# EAGLE board v2m (EAGLE 6.2)
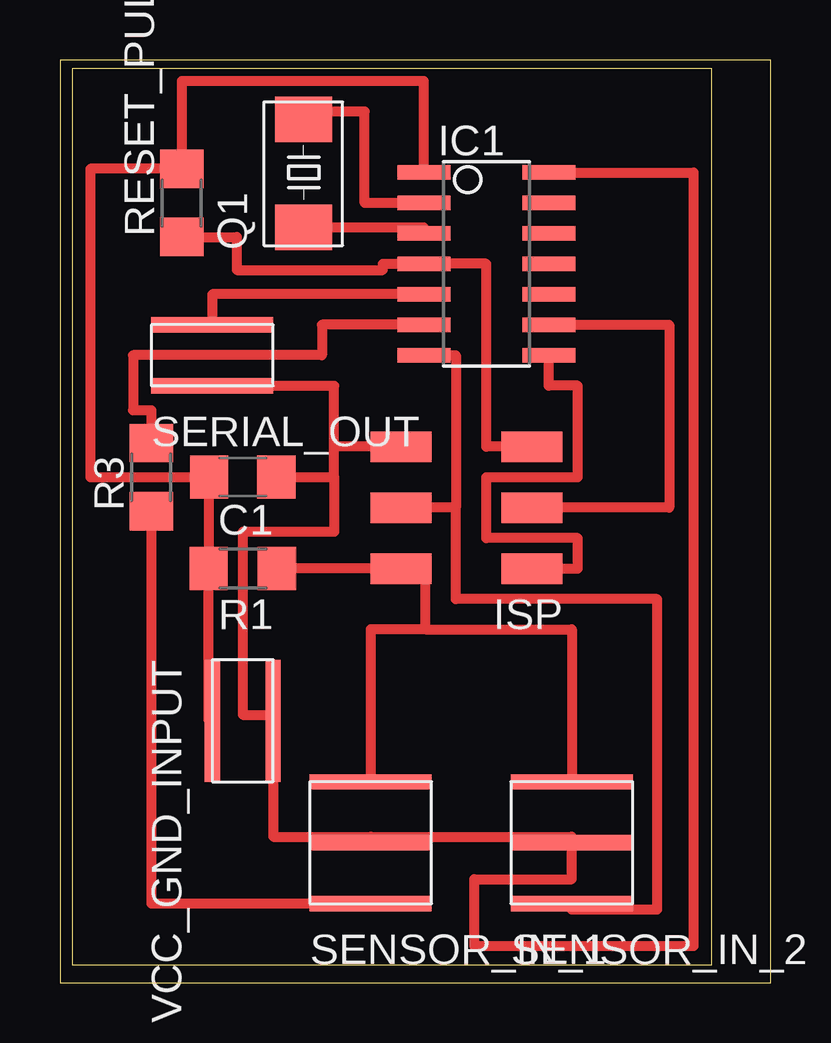
[diagram p0: board, top side]

Size 29.64 x 38.47 mm. Coordinates in mm from the lower left corner, seen from the top.
Outline: 0,0 29.64,0 29.64,38.47 0,38.47 0,0
Copper layers (1*16): Top 0.035mm / dielectric 1.5mm / Bottom 0.035mm
Design rules: minimum track width 10mil, minimum drill 24mil, track to track 8mil, track to pad 8mil, pad to pad 8mil, via to via 8mil, smd to smd 8mil, copper to edge 40mil, drill to drill 8mil, minimum pad ring 10mil, minimum via ring 8mil, stop-mask expansion 4mil, vias tented up to drill 0mil, thermal gap 10mil

## Footprints (pad centres in the part's own frame; a part is rotated, then mirrored left to right if it is on the bottom)
C1206 = smd 1.6 x 1.8: 1 -1.4,0; 2 1.4,0
SOIC14 = smd 0.61 x 2.21: 1 -3.81,-2.603; 2 -2.54,-2.603; 3 -1.27,-2.603; 4 0,-2.603; 5 1.27,-2.603; 6 2.54,-2.603; 7 3.81,-2.603; 8 3.81,2.603; 9 2.54,2.603; 10 1.27,2.603; 11 0,2.603; 12 -1.27,2.603; 13 -2.54,2.603; 14 -3.81,2.603
2X03SMD = smd 2.54 x 1.27: 1 -2.54,2.54; 2 2.92,2.54; 3 -2.54,0; 4 2.92,0; 5 -2.54,-2.54; 6 2.92,-2.54
CS10 = smd 1.905 x 2.388: P$1 -2.286,0; P$2 2.21,0
R1206 = smd 1.6 x 1.803: 1 -1.422,0; 2 1.422,0
SMT_PINS_3 = smd 5.08 x 0.635: 1 0,0; 2 0,2.54; 3 0,5.08
SMT_PINS_2 = smd 5.08 x 0.635: 1 0,0; 2 0,2.54

## Placement (x,y rotation side)
C1  1uF  [C1206]  7.62,21.08 180 top
IC1  ATTINY44-SSU  [SOIC14]  17.78,29.97 270 top
ISP  AVRISPSMD  [2X03SMD]  17.14,19.81 180 top
Q1  20 MHz  [CS10]  10.16,33.78 90 top
R1  [R1206]  7.62,17.27 180 top
R3  0 Ohm  [R1206]  3.81,21.08 90 top
RESET_PULLUP  10k  [R1206]  5.08,32.51 90 top
SENSOR_IN_1  [SMT_PINS_3]  12.95,3.3 0 top
SENSOR_IN_2  [SMT_PINS_3]  21.34,3.3 0 top
SERIAL_OUT  2_PIN_HEADERHEADER  [SMT_PINS_2]  6.35,24.89 0 top
VCC_GND_INPUT  2_PIN_HEADERHEADER  [SMT_PINS_2]  6.35,10.92 270 top

## Library data of the parts
C1 R3 RESET_PULLUP = resistor
IC1 ISP R1 = fab
Q1 SENSOR_IN_1 SENSOR_IN_2 SERIAL_OUT VCC_GND_INPUT = ng

## Nets
ATTINY45: IC1.9 ISP.3
N$2: C1.2 IC1.1 R1.2 RESET_PULLUP.2 VCC_GND_INPUT.1
N$3: C1.1 IC1.14 ISP.6 SENSOR_IN_1.2 SENSOR_IN_2.2 SERIAL_OUT.1 VCC_GND_INPUT.2
N$4: IC1.8 ISP.1
N$5: IC1.4 ISP.5 RESET_PULLUP.1
N$6: IC1.5 SERIAL_OUT.2
N$7: IC1.2 Q1.P$2
N$8: ISP.2 R1.1 SENSOR_IN_1.3 SENSOR_IN_2.3
N$9: R3.1 SENSOR_IN_1.1
N$12: IC1.6 R3.2
N$13: IC1.3 Q1.P$1
N$21: IC1.7 ISP.4 SENSOR_IN_2.1

## Tracks (layer width: path | path; a pad name or v marks a point on that pad's centre or on a via)
ATTINY45
  Top 0.406: IC1.9 25.4,27.43 25.4,19.81 ISP.3
N$2
  Top 0.406: IC1.1 15.18,37.59 5.08,37.59 RESET_PULLUP.2 1.27,33.93 1.27,21.08 C1.2 6.2,21.08 R1.2 6.2,10.92 VCC_GND_INPUT.1
N$3
  Top 0.406: ISP.6 11.43,22.35 | 11.43,21.08 11.43,22.35 | 8.89,11.18 VCC_GND_INPUT.2 8.89,6.1 12.95,6.1 | 11.43,22.35 11.43,24.89 SERIAL_OUT.1 | 8.89,21.08 C1.1 11.43,21.08 | 11.43,21.08 11.43,18.8 7.62,18.8 7.62,11.18 8.89,11.18 | 8.89,11.18 8.89,12.19 | IC1.14 26.42,33.78 26.42,1.52 17.27,1.52 17.27,4.32 21.34,4.32 SENSOR_IN_2.2 21.34,6.1 12.95,6.1 | SENSOR_IN_1.2 12.95,6.1
N$4
  Top 0.406: ISP.1 21.59,17.27 21.59,18.54 17.78,18.54 17.78,21.08 21.59,21.08 21.59,24.89 20.38,24.89 IC1.8
N$5
  Top 0.406: ISP.5 17.78,22.35 17.78,29.97 IC1.4 13.46,29.97 13.46,29.72 7.37,29.72 7.37,31.09 RESET_PULLUP.1
N$6
  Top 0.406: 15.24,28.7 IC1.5 6.35,28.7 SERIAL_OUT.2
N$7
  Top 0.406: IC1.2 12.7,32.51 12.7,36.32 10.16,36.32 Q1.P$2
N$8
  Top 0.406: R1.1 ISP.2 15.24,17.27 15.24,14.73 | 15.24,14.73 21.34,14.73 SENSOR_IN_2.3 | 15.24,14.73 12.95,14.73 SENSOR_IN_1.3
N$9
  Top 0.406: SENSOR_IN_1.1 3.81,3.3 R3.1
N$12
  Top 0.406: IC1.6 10.92,27.43 10.92,26.16 3.05,26.16 3.05,23.88 3.81,23.88 R3.2
N$13
  Top 0.406: Q1.P$1 15.18,31.5 IC1.3
N$21
  Top 0.406: 16.51,19.81 ISP.4 | IC1.7 16.51,26.16 16.51,19.81 | 16.51,19.81 16.51,16 24.89,16 24.89,3.05 21.34,3.05 SENSOR_IN_2.1